# Altium PCB YLCmarlin.PcbDoc (part 1 of 3)
Units mm, origin at the board's own origin, x right, y up, seen from the top; angles counter-clockwise.
Board outline 129.92 x 100.67 mm, 2 copper layers (Top Layer, Bottom Layer); 209 components, 193 nets, 781 pads, 1168 vias.
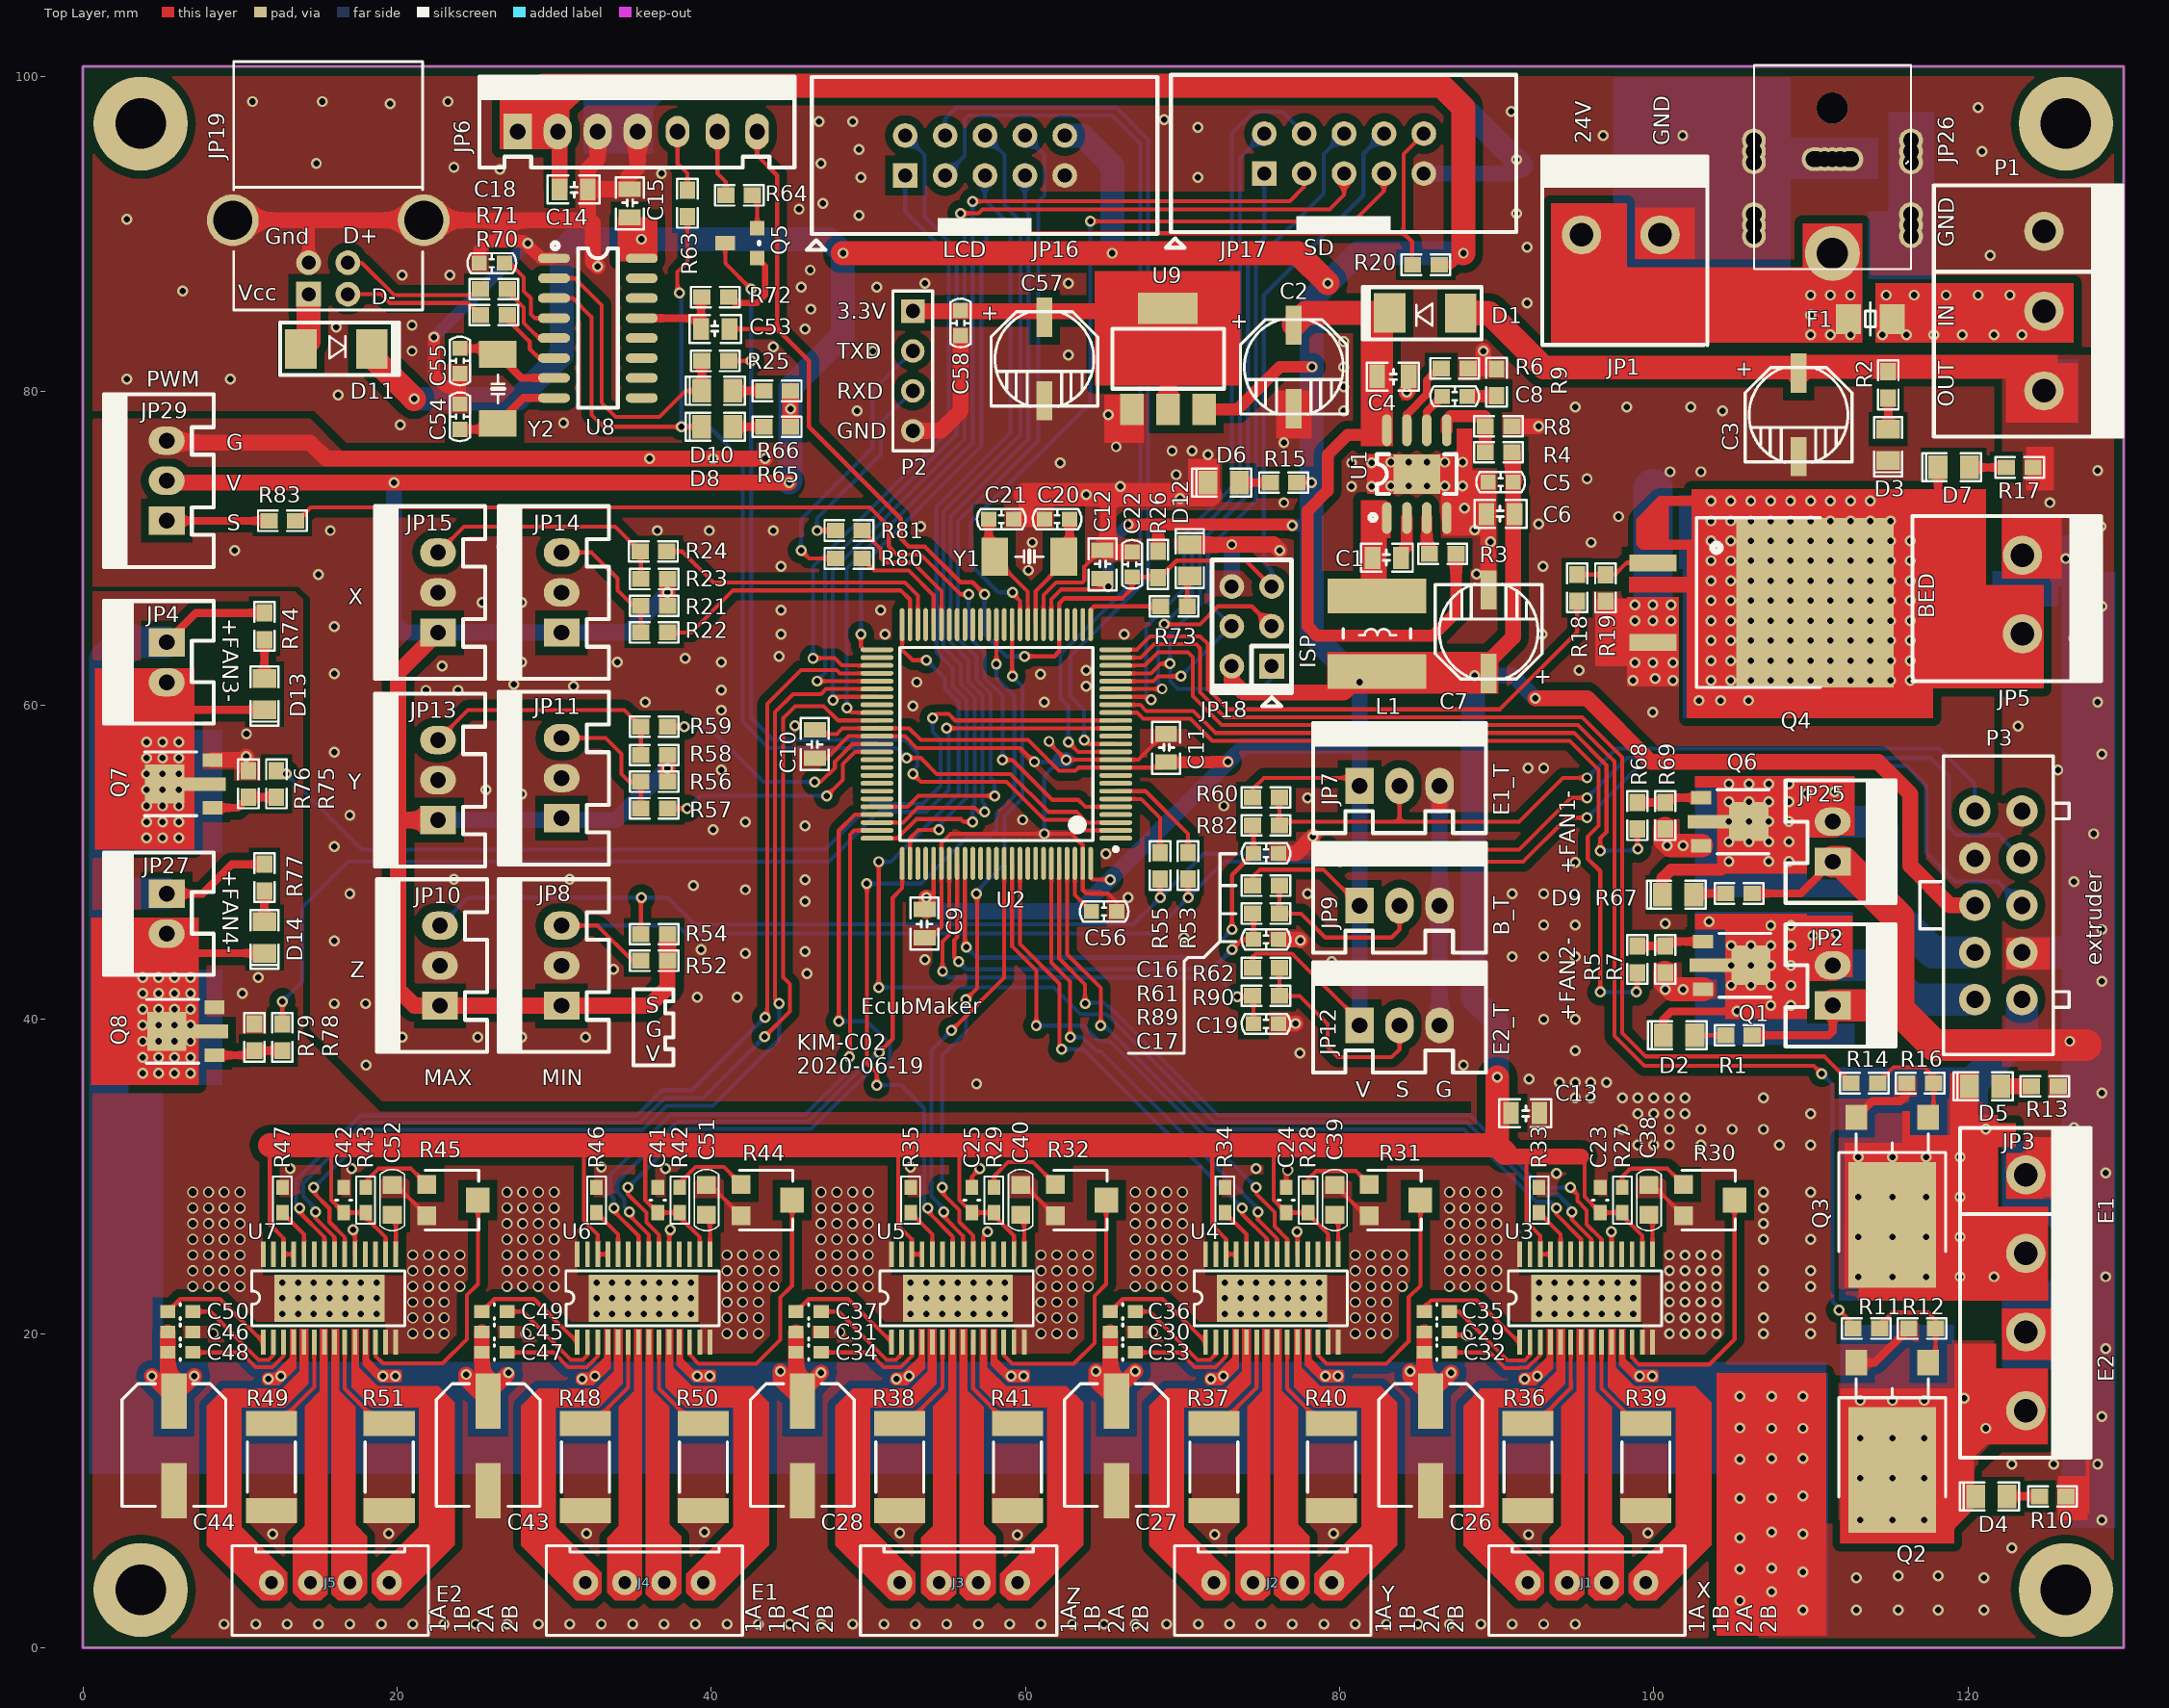
[diagram p0: Top Layer view]
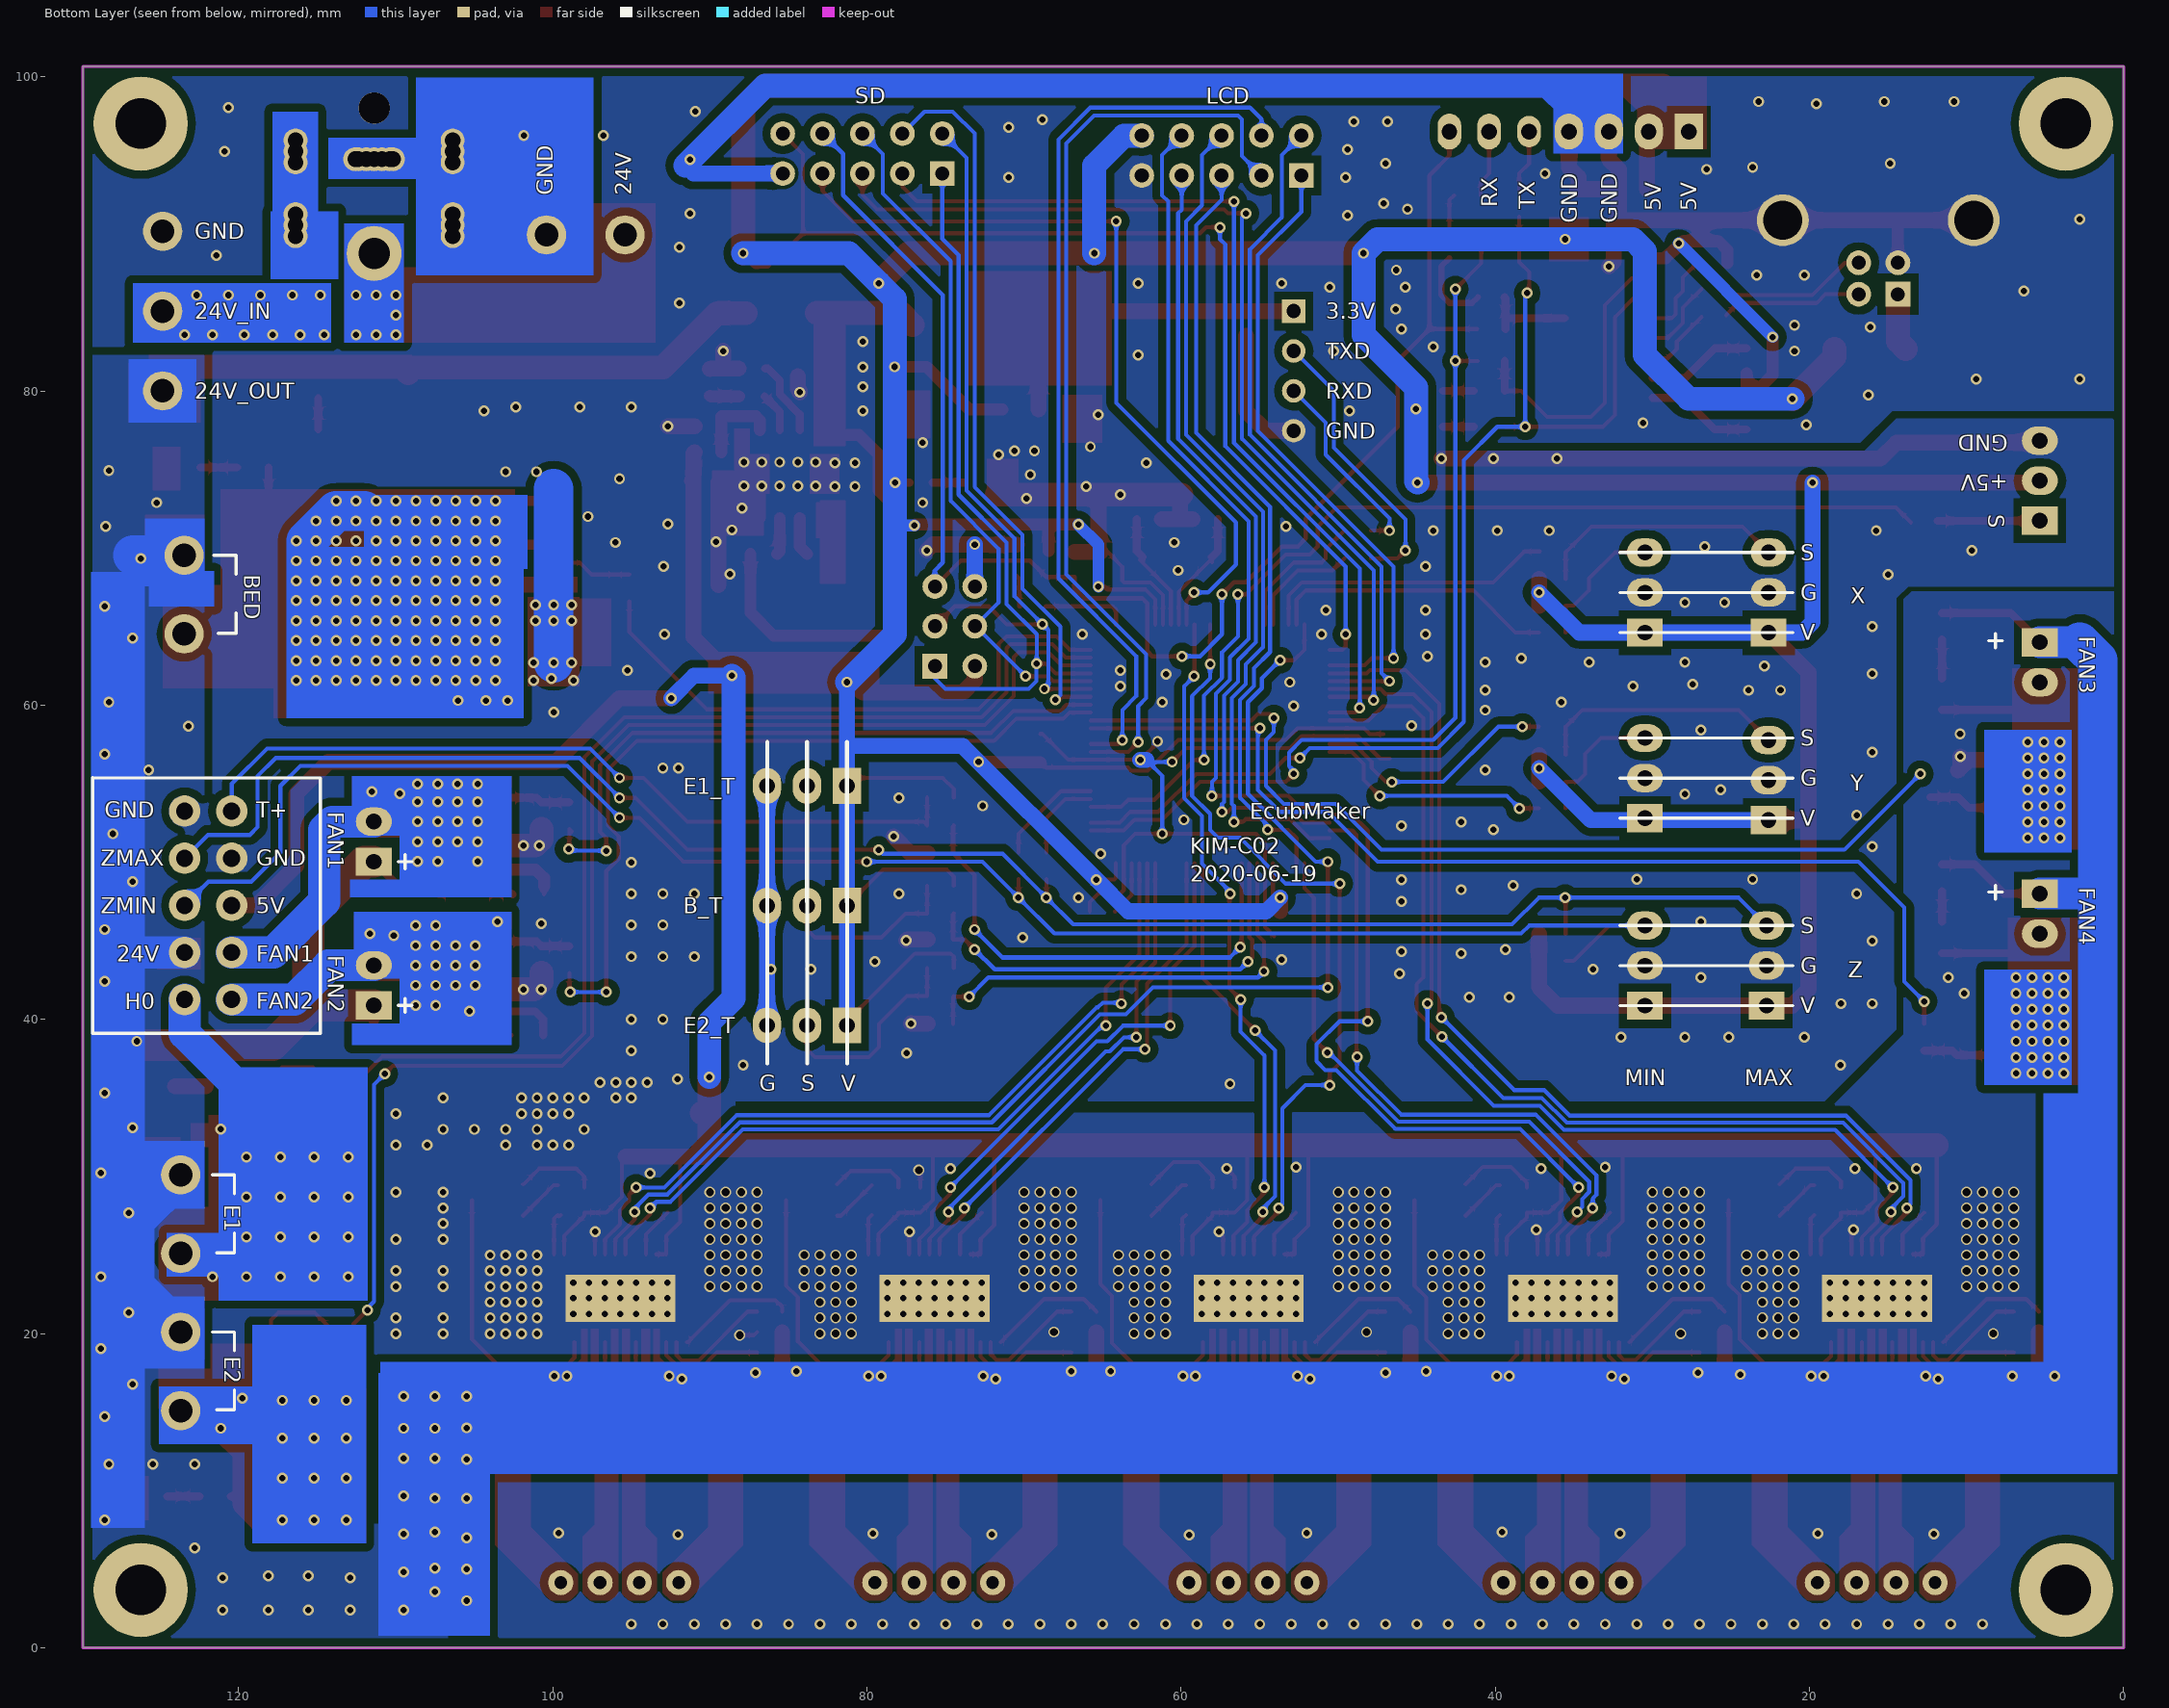
[diagram p1: Bottom Layer view, seen from below]

## Layer stack, top to bottom
Top Solder: solder mask 0.0102, Solder Resist, Dk 3.5
Top Layer: signal copper 0.0356
Dielectric1: core 0.32, FR-4, Dk 4.8
Bottom Layer: signal copper 0.0356
Bottom Solder: solder mask 0.0102, Solder Resist, Dk 3.5

## Board outline
0,0 129.921,0 129.921,100.668 0,100.668

## Design rules (kind name [scope] priority, off if disabled: settings)
Clearance [InPolygon] p1: gap=0.508 ignorepadtopadclearanceinfootprint=FALSE except(0: Arc-Hole Track-Hole SMDPad-Hole THPad-Hole Via-Hole Fill-Hole Poly-Hole Region-Hole Text-Hole)
Clearance Clearance_1 [All] p2: gap=0.2 ignorepadtopadclearanceinfootprint=FALSE except(0: Arc-Hole Track-Hole SMDPad-Hole THPad-Hole Via-Hole Fill-Hole Poly-Hole Region-Hole Text-Hole)
ComponentClearance [All] p1: gap=0.2 collisioncheckmode=3 verticalgap=0.2 showdistances=FALSE
PolygonConnect v12 [InNet('VCC_12V')] p1: connectstyle=Direct reliefconductorwidth=0.254 reliefentries=4 polygonreliefangle="90 Angle" airgapwidth=0.254
PolygonConnect GND [InNet('GND')] p2: connectstyle=Direct reliefconductorwidth=0.254 reliefentries=4 polygonreliefangle="90 Angle" airgapwidth=0.254
PolygonConnect [All] p3: connectstyle=Relief reliefconductorwidth=0.254 reliefentries=4 polygonreliefangle="90 Angle" airgapwidth=0.254
RoutingVias [All] p1: holewidth=0.508 width=0.711 viastyle="Through Hole" minholewidth=0.4 minwidth=0.7 maxholewidth=0.7 maxwidth=1.27
SilkToSolderMaskClearance SilkscreenOverComponentPads [IsPad] p1: minsilkscreentomaskgap=0.254 clearancetoexposedcopper=TRUE
SolderMaskExpansion [All] p1: expansion=0.102
Width 12v [InNet('VCC_12V')] p1: maxlimit=5 minlimit=0.254 preferedwidth=1
Width [All] p2: maxlimit=3.81 minlimit=0.254 preferedwidth=0.254
28 further rules are at their usual default settings.

## Classes and differential pairs
component class Power: C1 C2 C3 C4 C5 C6 C7 C8 C9 C10 C11 C12 C13 C14 C15 C18 C53 C54 C55 C57 C58 D1 D3 D6 D8 D10 D11 F1 JP1 JP6 JP19 JP26 L1 P1 P2 Q5 R2 R3 R4 R6 R8 R9 R15 R25 R63 R64 R65 R66 R70 R71 R72 R80 R81 U1 U8 U9 Y2
component class MCU: C16 C17 C19 C20 C21 C22 C56 D12 JP7 JP8 JP9 JP10 JP11 JP12 JP13 JP14 JP15 JP16 JP17 JP18 JP29 R20 R21 R22 R23 R24 R26 R52 R53 R54 R55 R56 R57 R58 R59 R60 R61 R62 R73 R82 R83 R89 R90 U2 Y1
component class misc: D2 D4 D5 D7 D9 D13 D14 JP2 JP3 JP4 JP5 JP25 JP27 P3 Q1 Q2 Q3 Q4 Q6 Q7 Q8 R1 R5 R7 R10 R11 R12 R13 R14 R16 R17 R18 R19 R67 R68 R69 R74 R75 R76 R77 R78 R79
component class MOTO1: C23 C24 C25 C26 C27 C28 C29 C30 C31 C32 C33 C34 C35 C36 C37 C38 C39 C40 C41 C42 C43 C44 C45 C46 C47 C48 C49 C50 C51 C52 J1 J2 J3 J4 J5 R27 R28 R29 R30 R31 R32 R33 R34 R35 R36 R37 R38 R39 R40 R41 R42 R43 R44 R45 R46 R47 R48 R49 R50 R51 U3 U4 U5 U6 U7

## Components (designator, comment, footprint, x,y, rotation, side; value= is the part's Value field where it differs from the comment)
C1 "104K" 0805(CS) 83.015,69.377 r0 top
C2 "35V100uF" F6#1 77.089,81.534 r180 top (schematic designator C26)
C3 "35V100uF" F6#1 109.22,78.486 r180 top (schematic designator C26)
C4 "104K" 0805(C) 83.396,80.934 r180 top
C5 "106M" 0603(C) 90.254,74.203 r180 top
C6 "104K" 0805(CS) 90.254,72.171 r0 top
C7 "35V47uF" F6#1 89.492,64.678 r0 top
C8 "272K" 0603(C) 87.333,79.664 r0 top
C9 "104K" 0805(CS) 53.594,46.101 r90 top
C10 "104K" 0805(CS) 46.609,57.531 r90 top
C11 "104K" 0805(CS) 68.961,57.277 r270 top
C12 "104K" 0805(CS) 64.897,68.961 r270 top
C13 "104K" 0805(CS) 91.821,34.036 r180 top
C14 "104K" 0805(CS) 31.242,92.837 r180 top
C15 "104" 0805(CS) 34.798,91.948 r270 top
C16 "106M" 0603(C) 75.321,50.57 r0 top
C17 "106M" 0603(C) 75.321,45.085 r0 top
C18 "103" 0603(C) 26.035,88.138 r180 top
C19 "106M" 0603(C) 75.321,39.719 r0 top
C20 "22pF" 0603(C) 62.022,71.844 r0 top
C21 "22pF" 0603(C) 58.466,71.844 r180 top
C22 "102" 0603(C) 66.792,68.961 r270 top
C23 "100n/50V" C0603(1608) 96.6,28.5 r90 top
C24 "100n/50V" C0603(1608) 76.6,28.5 r90 top
C25 "100n/50V" C0603(1608) 56.6,28.5 r90 top
C26 "100UF/35V" C6.3x7.7贴片铝电解电容 82.5,9 r0 top
C27 "100UF/35V" C6.3x7.7贴片铝电解电容 62.5,9 r0 top
C28 "100UF/35V" C6.3x7.7贴片铝电解电容 42.5,9 r0 top
C29 "100n/50V" C0603(1608) 86.2,20.1 r0 top
C30 "100n/50V" C0603(1608) 66.2,20.1 r0 top
C31 "100n/50V" C0603(1608) 46.2,20.1 r0 top
C32 "100n/50V" C0603(1608) 86.2,18.8 r0 top
C33 "100n/50V" C0603(1608) 66.2,18.8 r0 top
C34 "100n/50V" C0603(1608) 46.2,18.8 r0 top
C35 "22n/50V" C0603(1608) 86.2,21.4 r180 top
C36 "22n/50V" C0603(1608) 66.2,21.4 r180 top
C37 "22n/50V" C0603(1608) 46.2,21.4 r180 top
C38 "2.2u/50V" C0805(2012) 99.7,28.5 r90 top
C39 "2.2u/50V" C0805(2012) 79.7,28.5 r90 top
C40 "2.2u/50V" C0805(2012) 59.7,28.5 r90 top
C41 "100n/50V" C0603(1608) 36.6,28.5 r90 top
C42 "100n/50V" C0603(1608) 16.6,28.5 r90 top
C43 "100UF/35V" C6.3x7.7贴片铝电解电容 22.5,9 r0 top
C44 "100UF/35V" C6.3x7.7贴片铝电解电容 2.5,9 r0 top
C45 "100n/50V" C0603(1608) 26.2,20.1 r0 top
C46 "100n/50V" C0603(1608) 6.2,20.1 r0 top
C47 "100n/50V" C0603(1608) 26.2,18.8 r0 top
C48 "100n/50V" C0603(1608) 6.2,18.8 r0 top
C49 "22n/50V" C0603(1608) 26.2,21.4 r180 top
C50 "22n/50V" C0603(1608) 6.2,21.4 r180 top
C51 "2.2u/50V" C0805(2012) 39.7,28.5 r90 top
C52 "2.2u/50V" C0805(2012) 19.7,28.5 r90 top
C53 "104K" 0805(CS) 40.259,83.947 r0 top
C54 "22pF" 0603(C) 24.003,78.359 r270 top
C55 "22pF" 0603(C) 24.003,81.915 r90 top
C56 "105M" 0603(C) 65.014,46.863 r180 top
C57 "16V220uF" F6#2 61.214,84.709 r0 top
C58 "104M" 0603(C) 55.88,84.328 r270 top
D1 "SS24" SMA 85.471,84.963 r180 top
D2 "LED" LED-SMD-0805 101.621,38.99 r180 top
D3 "LED" LED-SMD-0805 114.935,76.581 r270 top
D4 "LED" LED-SMD-0805 121.5,9.64 r180 top
D5 "LED" LED-SMD-0805 121.1,35.74 r180 top
D6 "LED" LED-SMD-0805 72.628,74.168 r180 top
D7 "LED" LED-SMD-0805 119.1,75.14 r180 top
D8 "LED" LED-SMD-0805 40.386,77.724 r180 top
D9 "LED" LED-SMD-0805 101.562,47.95 r180 top
D10 "LED" LED-SMD-0805 40.386,80.01 r180 top
D11 "SS24" SMA 16.129,82.677 r0 top
D12 "LED" LED-SMD-0805 70.475,69.215 r90 top
D13 "LED" LED-SMD-0805 11.557,60.706 r270 top
D14 "LED" LED-SMD-0805 11.557,45.212 r270 top
F1 "10A" 1206(F) 113.792,84.582 r180 top
J1 "H4P" XH2.54(2.5mm)x4P 102,6.5 r180 top
J2 "H4P" XH2.54(2.5mm)x4P 82,6.5 r180 top
J3 "H4P" XH2.54(2.5mm)x4P 62,6.5 r180 top
J4 "H4P" XH2.54(2.5mm)x4P 42,6.5 r180 top
J5 "H4P" XH2.54(2.5mm)x4P 22,6.5 r180 top
JP1 "HEADER 2" "POWER JACK-2*5.0" 98.044,89.916 r0 top
JP2 "FAN1" XH2.54-2P 111.4,42.165 r90 top
JP3 "L&E" KF127-4*5.0 123.698,30.099 r270 top
JP4 "FAN2" XH2.54-2P 5.334,62.733 r270 top
JP5 "BED" "POWER JACK-2*5.0" 123.45,66.907 r270 top
JP6 "Header 7H" XH2.54-7P 35.306,96.52 r0 top
JP7 "ADC13" XH2.54-3P 83.82,54.864 r0 top
JP8 "XMIN" XH2.54-3P 30.48,43.424 r90 top
JP9 "ADC14" XH2.54-3P 83.82,47.244 r0 top
JP10 "XMAX" XH2.54-3P 22.733,43.424 r90 top
JP11 "YMIN" XH2.54-3P 30.48,55.362 r90 top
JP12 "ADC15" XH2.54-3P 83.82,39.624 r0 top
JP13 "YMAX" XH2.54-3P 22.606,55.235 r90 top
JP14 "ZMIN" XH2.54-3P 30.48,67.173 r90 top
JP15 "ZMAX" XH2.54-3P 22.606,67.173 r90 top
JP16 "LCD" IDC10-BASE 57.404,94.996 r0 top
JP17 "SD CARD" IDC10-BASE 80.264,95.123 r0 top
JP18 "ICSP" IDC6X2.54 74.412,65.024 r90 top
JP19 "USB-B" USBBW 15.621,88.519 r270 top locked
JP25 "FAN0" XH2.54-2P 111.4,51.315 r90 top
JP26 "DC5.5-2.5Z" DC-528 111.379,87.757 r0 top locked
JP27 "FAN3" XH2.54-2P 5.334,46.731 r270 top
JP29 "SERVO" XH2.54-3P 5.334,74.295 r90 top
L1 "NR6045T6R8M" COKE_6X6 82.38,64.551 r270 top
P1 "Header 3" "POWER JACK-3*5.0" 124.841,85.09 r270 top
P2 "Header 4" HDR1X4 52.832,85.09 r270 top
P3 "Header 5X2" HX30002-10A 123.444,53.261 r270 top
Q1 "2SD965A" SOT89-3357 104.669,43.435 r270 top
Q2 "NCE3050K" TO252 115.189,14.732 r180 top
Q3 "NCE3050K" TO252 115.189,30.353 r180 top
Q4 "NCE40H20AD" TO263-S 106.813,66.526 r270 top
Q5 "8050" SOT23 41.91,89.408 r90 top
Q6 "2SD965A" SOT89-3357 104.542,52.585 r270 top
Q7 "2SD965A" SOT89-3357 6.731,54.991 r90 top
Q8 "2SD965A" SOT89-3357 6.858,39.243 r90 top
R1 "10K" 0603(R) 105.431,38.99 r180 top
R2 "10K" 0603(R) 114.935,80.391 r270 top
R3 "100K" 0603(R) 86.571,69.631 r180 top
R4 "62K 1%" 0603(R) 90.127,76.108 r180 top
R5 "2K" 0603(R) 98.954,43.816 r90 top
R6 "100K" 0603(R) 87.333,81.442 r0 top
R7 "100K" 0603(R) 100.732,43.816 r90 top
R8 "11K8 1%" 0603(R) 90.127,77.759 r0 top
R9 "24K" 0603(R) 90,80.553 r90 top
R10 "10K" 0603(R) 125.4,9.64 r180 top
R11 "2K" 0603(R) 113.538,20.32 r0 top
R12 "100K" 0603(R) 117.094,20.32 r0 top
R13 "10K" 0603(R) 124.9,35.74 r180 top
R14 "2K" 0603(R) 113.411,35.941 r0 top
R15 "2K" 0603(R) 76.438,74.168 r180 top
R16 "100K" 0603(R) 116.967,35.941 r0 top
R17 "10K" 0603(R) 123.3,75.14 r180 top
R18 "2K" 0603(R) 95.129,67.467 r90 top
R19 "100K" 0603(R) 96.93,67.461 r90 top
R20 "10K" 0603(R) 85.5,88.04 r0 top
R21 "4.7K" 0603(R) 36.373,66.333 r180 top
R22 "1K" 0603(R) 36.373,64.633 r0 top
R23 "4.7K" 0603(R) 36.373,68.033 r180 top
R24 "1K" 0603(R) 36.322,69.786 r0 top
R25 "1K" 0603(R) 40.259,81.915 r180 top
R26 "10K" 0603(R) 68.443,68.961 r90 top
R27 "10k" R0603(1608) 98,28.5 r270 top
R28 "10k" R0603(1608) 78,28.5 r270 top
R29 "10k" R0603(1608) 58,28.5 r270 top
R30 "10k" R3x3-贴片电位器 103.5,28.5 r270 top
R31 "10k" R3x3-贴片电位器 83.5,28.5 r270 top
R32 "10k" R3x3-贴片电位器 63.5,28.5 r270 top
R33 "10k" R0603(1608) 92.7,28.5 r90 top
R34 "10k" R0603(1608) 72.7,28.5 r90 top
R35 "10k" R0603(1608) 52.7,28.5 r90 top
R36 "0.15/2w" R2512 92,11.5 r90 top
R37 "0.15/2w" R2512 72,11.5 r90 top
R38 "0.15/2w" R2512 52,11.5 r90 top
R39 "0.15/2w" R2512 99.5,11.5 r90 top
R40 "0.15/2w" R2512 79.5,11.5 r90 top
R41 "0.15/2w" R2512 59.5,11.5 r90 top
R42 "10k" R0603(1608) 38,28.5 r270 top
R43 "10k" R0603(1608) 18,28.5 r270 top
R44 "10k" R3x3-贴片电位器 43.5,28.5 r270 top
R45 "10k" R3x3-贴片电位器 23.5,28.5 r270 top
R46 "10k" R0603(1608) 32.7,28.5 r90 top
R47 "10k" R0603(1608) 12.7,28.5 r90 top
R48 "0.15/2w" R2512 32,11.5 r90 top
R49 "0.15/2w" R2512 12,11.5 r90 top
R50 "0.15/2w" R2512 39.5,11.5 r90 top
R51 "0.15/2w" R2512 19.5,11.5 r90 top
R52 "4.7K" 0603(R) 36.373,43.733 r180 top
R53 "1K" 0603(R) 70.358,49.784 r90 top
R54 "4.7K" 0603(R) 36.373,45.433 r180 top
R55 "1K" 0603(R) 68.58,49.784 r90 top
R56 "4.7K" 0603(R) 36.373,55.133 r180 top
R57 "1K" 0603(R) 36.373,53.433 r0 top
R58 "4.7K" 0603(R) 36.373,56.833 r180 top
R59 "1K" 0603(R) 36.373,58.633 r0 top
R60 "4.7K" 0603(R) 75.321,54.126 r0 top
R61 "4.7K" 0603(R) 75.321,48.514 r0 top
R62 "4.7K" 0603(R) 75.321,43.275 r0 top
R63 "51R" 0603(R) 38.481,91.948 r270 top
R64 "51R" 0603(R) 41.783,92.456 r0 top
R65 "202" 0603(R) 44.196,77.724 r0 top
R66 "202" 0603(R) 44.196,80.01 r0 top
R67 "10K" 0603(R) 105.431,48.018 r180 top
R68 "2K" 0603(R) 98.954,52.966 r90 top
R69 "100K" 0603(R) 100.732,52.966 r90 top
R70 "22R" 0603(R) 26.162,84.836 r0 top
R71 "22R" 0603(R) 26.162,86.487 r0 top
R72 "1k" 0603(R) 40.259,85.979 r0 top
R73 "2K" 0603(R) 69.459,66.294 r0 top
R74 "10K" 0603(R) 11.557,65.024 r270 top
R75 "2K" 0603(R) 12.319,54.991 r270 top
R76 "100K" 0603(R) 10.541,54.991 r270 top
R77 "10K" 0603(R) 11.557,49.022 r270 top
R78 "2K" 0603(R) 12.7,38.862 r270 top
R79 "100K" 0603(R) 10.922,38.862 r270 top
R80 "101" 0603(R) 48.768,69.342 r180 top
R81 "101" 0603(R) 48.768,71.12 r180 top
R82 "4.7K" 0603(R) 75.321,52.348 r0 top
R83 "1K" 0603(R) 12.7,71.74 r0 top
R89 "4.7K" 0603(R) 75.321,46.736 r0 top
R90 "4.7K" 0603(R) 75.321,41.497 r0 top
U1 "RT7272" SO8-EP 84.92,74.711 r0 top
U2 "ATmega2560-16AU" LQFP100 58.156,57.531 r180 top
U3 "TMC2225" HTSSOP28 100.5,20 r90 top
U4 "TMC2225" HTSSOP28 80.5,20 r90 top
U5 "TMC2225" HTSSOP28 60.5,20 r90 top
U6 "TMC2225" HTSSOP28 40.5,20 r90 top
U7 "TMC2225" HTSSOP28 20.5,20 r90 top
U8 "CH340G" SO-16 32.766,83.947 r270 top
U9 "1117-3.3" SOT223-1117 69.088,82.042 r0 top
Y1 "16M" CRYS-SMD-5032-2P 60.254,69.45 r0 top
Y2 "12M" CRYS-SMD-5032-2P 26.416,80.137 r270 top

## Footprints (in the part's own frame and the unit in brackets; to place one, negate y for a bottom-side part, rotate by r counter-clockwise, add the part's x,y. Pads: shape width x height; smd on the part's side, far side on the other; paste and mask are expansions set on the pad)
0603(C) [mm]
  rect 0.965x0.965 smd: 1(0.8,0) 2(-0.8,0)
  silkscreen extent -1.55,-0.64 1.55,0.64
0603(R) [mm]
  rect 1.1x1 smd: 1(-0.85,0) 2(0.85,0)
  silkscreen extent -1.55,-0.65 1.55,0.65
0805(C) [mm]
  rect 1x1.5 smd: 1(-1,0) 2(1,0)
  silkscreen extent -1.65,-0.88 1.65,0.9
0805(CS) [mm] "兼?"
  rect 1x1.4 smd: 1(-0.9,0) 2(0.9,0)
  silkscreen extent -1.65,-0.88 1.65,0.9
1206(F) [mm]
  rect 1.6x1.9 smd: 1(-1.4,0) 2(1.4,0)
  silkscreen extent -0.33,-1.02 0.33,1.02
C6.3x7.7贴片铝电解电容 [mm]
  rect 1.6x3.5 smd: 1(3.3,6.7) 2(3.3,1)
  silkscreen extent 0,0 6.6,7.8, body extent 0,0 6.6,7.8, height 7.7
C0603(1608) [mm]
  rect 0.965x0.8 smd: 1(-0.8,0) 2(0.8,0)
  silkscreen extent 0,-0.51 0,0.51, body extent -0.8,-0.4 0.8,0.4, height 0.5
C0805(2012) [mm]
  rect 1.14x1.2 smd: 1(-0.95,0) 2(0.95,0)
  silkscreen extent -1.95,-0.78 1.95,0.78, body extent -1,-0.6 1,0.6, height 0.5
COKE_6X6 [mm]
  rect 2.2x6.3 smd: 1(-2.4,0) 2(2.4,0)
  silkscreen extent -0.3,-2.15 0.3,2.15
CRYS-SMD-5032-2P [mm]
  rect 1.7x2.4 smd: 1(-2.2,0) 2(2.2,0)
  silkscreen extent -0.9,-0.37 0.9,0.4
DC-528 [mm]
  round 1.524 hole 1: 0(-5,2.1) 0(-5,2.8) 0(-5,3.5) 0(-5,6.8) 0(-5,7.5) 0(-5,8.2) 0(5,2.1) 0(5,2.8) 0(5,3.5) 0(5,6.8) 0(5,7.5) 0(5,8.2) 2(-1.2,7) 2(-1,7) 2(-0.5,7) 2(0,7) 2(0.5,7) 2(1,7) 2(1.2,7)
  round 2 hole 2: 0(0,10.25)
  round 3.5 hole 2: 1(0,1)
  silkscreen extent -5,0 5,13
F6#1 [mm]
  rect 1x2.5 smd: 1(0,-2.663) 2(0,2.663)
  silkscreen extent -3.4,-3.02 3.4,3.04
F6#2 [mm]
  rect 1x2.5 smd: 1(0,-0.004) 2(0,-5.33)
  silkscreen extent -3.4,-5.71 3.4,0.35
HDR1X4 [mm] "Connector; Header; 4 Position"
  rect 1.5x1.5 hole 0.9: 1(0,0)
  round 1.5 hole 0.9: 2(2.54,0) 3(5.08,0) 4(7.62,0)
  silkscreen extent -1.27,-1.27 8.89,1.27
HTSSOP28 [mm]
  rect 1.6x0.3 smd: 1(-0.55,9.025) 2(-0.55,8.375) 3(-0.55,7.725) 4(-0.55,7.075) 5(-0.55,6.425) 6(-0.55,5.775) 7(-0.55,5.125) 8(-0.55,4.475) 9(-0.55,3.825) 10(-0.55,3.175) 11(-0.55,2.525) 12(-0.55,1.875) 13(-0.55,1.225) 14(-0.55,0.575) 15(5.05,0.575) 16(5.05,1.225) 17(5.05,1.875) 18(5.05,2.525) 19(5.05,3.175) 20(5.05,3.825) 21(5.05,4.475) 22(5.05,5.125) 23(5.05,5.775) 24(5.05,6.425) 25(5.05,7.075) 26(5.05,7.725) 27(5.05,8.375) 28(5.05,9.025)
  rect 3x7 smd: 29(2.25,4.8)
  rect 3x7 smd far side: 29(2.25,4.8)
  silkscreen extent 0.5,0 4,9.75
HX30002-10A [mm]
  round 2 hole 1.1: 1(0,0) 2(0,-3) 3(3,0) 4(3,-3) 5(6,0) 6(6,-3) 7(9,0) 8(9,-3) 9(12,0) 10(12,-3)
  silkscreen extent -3.5,-6.5 15.5,3
IDC6X2.54 [mil]
  rect 62x62 hole 35: 1(-100,-50)
  round 62 hole 35: 2(-100,50) 3(0,-50) 4(0,50) 5(100,-50) 6(100,50)
  silkscreen extent -201,-100 166,100
IDC10-BASE [mil]
  rect 62x62 hole 35: 1(-199.02,-50.2)
  round 62 hole 35: 2(-199.02,49.8) 3(-99.02,-50.2) 4(-99.02,49.8) 5(0.98,-50.2) 6(0.98,49.8) 7(100.98,-50.2) 8(100.98,49.8) 9(200.98,-50.2) 10(200.98,49.8)
  silkscreen extent -446,-236 433,197
KF127-4*5.0 [mm]
  round 2.5 hole 1.5: 1(0,0) 2(5,0) 3(10,0) 4(15,0)
  silkscreen extent -3,-4.2 18,4.1
LED-SMD-0805 [mm]
  rect 1.2x1.5 smd: 1(-1,0) 2(1,0)
  silkscreen extent -1.75,-0.89 2,0.89
LQFP100 [mm]
  oval 2.1x0.3 smd: 1(-7.6,6) 2(-7.6,5.5) 3(-7.6,5) 4(-7.6,4.5) 5(-7.6,4) 6(-7.6,3.5) 7(-7.6,3) 8(-7.6,2.5) 9(-7.6,2) 10(-7.6,1.5) 11(-7.6,1) 12(-7.6,0.5) 13(-7.6,0) 14(-7.6,-0.5) 15(-7.6,-1) 16(-7.6,-1.5) 17(-7.6,-2) 18(-7.6,-2.5) 19(-7.6,-3) 20(-7.6,-3.5) 21(-7.6,-4) 22(-7.6,-4.5) 23(-7.6,-5) 24(-7.6,-5.5) 25(-7.6,-6) 51(7.6,-6) 52(7.6,-5.5) 53(7.6,-5) 54(7.6,-4.5) 55(7.6,-4) 56(7.6,-3.5) 57(7.6,-3) 58(7.6,-2.5) 59(7.6,-2) 60(7.6,-1.5) 61(7.6,-1) 62(7.6,-0.5) 63(7.6,0) 64(7.6,0.5) 65(7.6,1) 66(7.6,1.5) 67(7.6,2) 68(7.6,2.5) 69(7.6,3) 70(7.6,3.5) 71(7.6,4) 72(7.6,4.5) 73(7.6,5) 74(7.6,5.5) 75(7.6,6)
  oval 0.3x2.1 smd: 26(-6,-7.6) 27(-5.5,-7.6) 28(-5,-7.6) 29(-4.5,-7.6) 30(-4,-7.6) 31(-3.5,-7.6) 32(-3,-7.6) 33(-2.5,-7.6) 34(-2,-7.6) 35(-1.5,-7.6) 36(-1,-7.6) 37(-0.5,-7.6) 38(0,-7.6) 39(0.5,-7.6) 40(1,-7.6) 41(1.5,-7.6) 42(2,-7.6) 43(2.5,-7.6) 44(3,-7.6) 45(3.5,-7.6) 46(4,-7.6) 47(4.5,-7.6) 48(5,-7.6) 49(5.5,-7.6) 50(6,-7.6) 76(6,7.6) 77(5.5,7.6) 78(5,7.6) 79(4.5,7.6) 80(4,7.6) 81(3.5,7.6) 82(3,7.6) 83(2.5,7.6) 84(2,7.6) 85(1.5,7.6) 86(1,7.6) 87(0.5,7.6) 88(0,7.6) 89(-0.5,7.6) 90(-1,7.6) 91(-1.5,7.6) 92(-2,7.6) 93(-2.5,7.6) 94(-3,7.6) 95(-3.5,7.6) 96(-4,7.6) 97(-4.5,7.6) 98(-5,7.6) 99(-5.5,7.6) 100(-6,7.6)
  silkscreen extent -7.72,-6.15 6.15,6.82
"POWER JACK-2*5.0" [mm]
  round 2.5 hole 1.5: 1(-2.633,0.023) 2(2.367,0.023)
  silkscreen extent -5.13,-6.98 5.37,5.02
"POWER JACK-3*5.0" [mm]
  round 2.5 hole 1.5: 1(-5.08,0) 2(0,0) 3(5.08,0)
  silkscreen extent -8,-7 8,5
R3x3-贴片电位器 [mm]
  rect 1.2x1.2 smd: 1(-1,-1.6) 3(1,-1.6)
  rect 1.6x1.5 smd: 2(0,1.65)
  silkscreen extent -1.9,-1.7 1.9,1.7, body extent -1.55,-1.8 1.55,1.95, height 1.55
R0603(1608) [mm]
  rect 0.965x0.8 smd: 1(-0.8,0) 2(0.8,0)
  silkscreen extent -1.5,-0.6 1.5,0.6, body extent -0.8,-0.4 0.8,0.4, height 0.5
R2512 [mm]
  rect 1.6x3.25 smd: 1(-2.775,0) 2(2.775,0)
  silkscreen extent -1.6,-1.52 1.6,1.53, body extent -3.17,-1.6 3.17,1.6, height 0.6
SMA [mm]
  rect 2x2.5 smd: 1(-2.25,0.003) 2(2.275,-0.003)
  silkscreen extent -3.58,-1.65 4,1.68
SO8-EP [mil]
  oval 24x80 smd: 1(-75,-110) 2(-25,-110) 3(25,-110) 4(75,-110) 5(75,110) 6(25,110) 7(-25,110) 8(-75,110)
  rect 117.72x98.03 smd: 9(0,0)
  silkscreen extent -118,-116 100,50
SO-16 [mil]
  oval 24x80 smd: 1(-177.31,-109.18) 2(-127.31,-109.18) 3(-77.31,-109.18) 4(-27.31,-109.18) 5(22.69,-109.18) 6(72.69,-109.18) 7(122.69,-109.18) 8(172.69,-109.18) 9(172.69,110.82) 10(122.69,110.82) 11(72.69,110.82) 12(22.69,110.82) 13(-27.31,110.82) 14(-77.31,110.82) 15(-127.31,110.82) 16(-177.31,110.82)
  silkscreen extent -217,-114 198,51
SOT23 [mil]
  rect 36x36 smd: 1(-37.5,-40) 2(37.5,-40)
  rect 36x50 smd: 3(0.5,40)
  silkscreen extent -2,-45 3,-45
SOT89-3357 [mm]
  rect 0.864x1.27 smd: 1(-1.524,-1.52) 2(1.524,-1.52)
  rect 2.5x2.5 smd: 3(-0.009,1.52)
  rect 0.864x3 smd: 3(-0.009,-0.88)
  silkscreen extent -2.03,-0.5 2.03,2.8
SOT223-1117 [mil]
  rect 59x79 smd: 1(-90.55,-126.77) 2(0,-126.77) 3(90.55,-126.77)
  rect 150x79 smd: 2(-0.67,126.77)
  silkscreen extent -140,-75 140,75
TO252 [mm]
  rect 1.4x1.6 smd: 1(-2.285,-3.423) 3(2.285,-3.423)
  rect 5.6x8 smd: 2(0,3.423)
  silkscreen extent -3.4,-2.38 3.4,5.12
TO263-S [mm]
  rect 1.07x3 smd: 1(-2.54,-6.85) 3(2.54,-6.85)
  rect 10.8x10 smd: 2(0,3.45)
  silkscreen extent -5.4,-4.09 5.4,3.79
USBBW [mm]
  rect 1.575x1.575 hole 0.889: 1(2.355,-1.25)
  round 1.575 hole 0.889: 2(2.355,1.25) 3(0.355,1.25) 4(0.355,-1.25)
  round 3.299 hole 2.5: 5(-2.355,-6.08) 6(-2.355,6.08)
  silkscreen extent -12.44,-6.02 3.35,6.02
XH2.54(2.5mm)x4P [mm]
  round 1.6 hole 0.8: 1(2.5,2.35) 2(5,2.35) 3(7.5,2.35) 4(10,2.35)
  silkscreen extent 0,0 12.5,5.7, body extent 0,0 12.5,5.7, height 8
XH2.54-2P [mm]
  rect 1.8x2.286 hole 1: 1(-1.275,0)
  oval 1.8x2.286 hole 1: 2(1.275,0)
  silkscreen extent -3.9,-4 3.9,3
XH2.54-3P [mm]
  rect 1.8x2.286 hole 1: 1(-2.55,0)
  oval 1.8x2.286 hole 1: 2(0,0) 3(2.55,0)
  silkscreen extent -5.5,-3 5.5,4
XH2.54-7P [mm]
  rect 1.8x2.286 hole 1: 1(-7.62,0)
  oval 1.8x2.286 hole 1: 2(-5.07,0) 3(-2.53,0) 4(0.01,0)
  oval 1.5x2 hole 1: 5(2.55,0)
  oval 1.5x2.286 hole 1: 6(5.09,0) 7(7.62,0)
  silkscreen extent -10.07,-2.3 10,3.5

## Part data
C1 C4 C5 C6 C8 C9 C10 C11 C12 C13 C14 C15 C16 C17 C18 C19 C20 C21 C22 C53 C54 C55 C56 C58: library part Cap, "Capacitor"
C2 C3 C7 C57: library part ELECTRO1, "Electrolytic Capacitor"
C23 C24 C25 C29 C30 C31 C32 C33 C34 C35 C36 C37 C38 C39 C40 C41 C42 C45 C46 C47 C48 C49 C50 C51 C52: library part Caps
C26 C27 C28 C43 C44: library part Capsp
D1 D11: library part DIODE, "Diode"
D2 D4 D5 D7 D8 D9 D10 D12 D13 D14: library part LED1, "Typical RED GaAs LED"
F1: library part FUSE1, "Fuse"
JP2 JP4 JP5 JP25 JP27: library part "HEADER 2"
JP3: library part "4 HEADER", "4 Pin Header"
JP6: "Header, 7-Pin, Right Angle"
JP7 JP8 JP9 JP10 JP11 JP12 JP13 JP14 JP15 JP29: library part "HEADER 3"
JP16 JP17: library part "HEADER 5X2"
JP18: library part "HEADER 3X2"
JP19: library part "HEADER 6"
L1: library part INDUCTOR
P1: "Header, 3-Pin"
P2: "Header, 4-Pin"
P3: "Header, 5-Pin, Dual row"
Q1 Q5 Q6 Q7 Q8: library part NPN, "NPN Transistor"
Q2 Q3 Q4: library part NMOS
R1 R2 R3 R4 R6 R8 R9 R10 R13 R15 R17 R63 R64 R65 R66 R67 R70 R71 R72 R73 R74 R77 R80 R81: library part Res2, "Resistor"
R5 R7 R11 R12 R14 R16 R18 R19 R20 R21 R23 R26 R52 R54 R56 R58 R60 R61 R62 R68 R69 R75 R76 R78 R79 R82 R89 R90: library part Res2, "1K"
R22 R24 R53 R55 R57 R59 R83: library part Res2
R25: library part RES2, "Resistor"
R27 R28 R29 R33 R34 R35 R36 R37 R38 R39 R40 R41 R42 R43 R46 R47 R48 R49 R50 R51: library part Ress
R30 R31 R32 R44 R45: library part Resc
U2: library part ATmega2560
U9: library part 1117
Y1 Y2: library part CRYSTAL, "Crystal"

## Free pads (board coordinates)
  round 6 hole 3.2: 0(3.683,3.683) 0(3.683,97.028) 0(126.238,3.683) 0(126.238,97.028)

## Via types
v1: diameter 0.7, hole 0.4, Top Layer to Bottom Layer, tented both sides, 830 vias
v2: diameter 0.7, hole 0.5, Top Layer to Bottom Layer, tented both sides, 230 vias
v3: diameter 0.7, hole 0.4, Top Layer to Bottom Layer, 108 vias

## Nets (pads, with @x,y where several pads share a name; then routed paths per layer and width w, separated by ;. In a path a pad name is that pad's centre, name@x,y a point inside that pad or via, vN(x,y) a via of type N, cw(c..) or ccw(c..) an arc to the next point about the centre after c; other vN are vias at no path point)
3.3V: C57.1 C58.2 P2.1 U9.2 | length 22.7
  Top Layer w1.016: P2.1@52.832,85.09 U9.2@68.899,85.09 ; U9.2@69.071,85.262 U9.2@68.899,85.09 ; U9.2@69.088,78.822 69.088,84.901 U9.2@68.899,85.09
/EN_E0: U2.76 U6.21 | length 38.2
  Top Layer w0.254: v1(34.8,27.75) 34.8,27.513 36.025,26.288 U6.21@36.025,25.05 ; v1(50.7,37.9) 51.552,38.752 51.552,47.742 52.156,48.346 U2.76@52.156,49.931
  Bottom Layer w0.254: v1(34.8,27.75) 34.477,28.073 34.477,28.566 34.023,29.02 34.023,29.657 37.85,33.484 46.184,33.484 50.6,37.9 v1(50.7,37.9)
/EN_E1: U2.60 U7.21 | length 66.4
  Top Layer w0.254: v1(14.8,27.75) 14.8,27.358 16.025,26.133 U7.21@16.025,25.05 ; v1(43.4,38.9) 45.006,40.506 45.006,42.243 44.577,42.672 44.577,59.182 45.339,59.944 47.158,59.944 48.071,59.031 U2.60@50.556,59.031
  Bottom Layer w0.254: v1(14.8,27.75) 14.8,27.957 14.023,28.734 14.023,29.58 17.864,33.421 35.454,33.421 37.033,35 39.5,35 v1(43.4,38.9)
/EN_X: U2.50 U3.21 | length 81
  Top Layer w0.254: v1(50.663,50.038) 50.663,42.047 v1(50.673,42.037) ; U2.50@52.156,65.131 52.156,63.531 52.822,62.865 v1(53.711,62.865) ; v1(94.8,27.75) 94.8,27.242 96.025,26.017 U3.21@96.025,25.05
  Bottom Layer w0.254: v1(50.663,50.038) 51.435,50.038 55.753,54.356 55.753,60.198 54.864,61.087 54.864,61.712 v1(53.711,62.865) ; v1(50.673,42.037) 61.798,42.037 63.517,40.317 65.183,40.317 72.054,33.446 88.096,33.446 88.7,32.842 88.716,32.842 92.712,28.846 93.911,28.846 94.8,27.957 v1(94.8,27.75)
/EN_Y: U2.95 U4.21 | length 31.4
  Top Layer w0.254: U2.95@61.656,49.931 61.656,43.617 62.855,42.418 v1(62.855,38.862) ; v1(74.8,27.75) 74.8,27.258 76.025,26.033 U4.21@76.025,25.05
  Bottom Layer w0.254: v1(62.855,38.862) 63.638,38.862 64.546,37.954 64.803,37.954 74.8,27.957 v1(74.8,27.75)
/EN_Z: U2.89 U5.21 | length 27.6
  Top Layer w0.254: v1(54.8,27.75) 54.8,27.458 56.025,26.233 U5.21@56.025,25.05 ; v1(55.3,39.3) 58.656,42.656 U2.89@58.656,49.931
  Bottom Layer w0.254: v1(54.8,27.75) 54.8,27.957 54.023,28.734 54.023,38.023 v1(55.3,39.3)
ADC11: U2.86
ADC12: U2.85
ADC13: C16.2 R82.1 U2.84 | length 30.5
  Top Layer w0.279: U2.84@56.156,49.931 56.156,44.687 v1(56.238,44.605) ; v1(73.152,45.72) 73.152,49.201 C16.2@74.521,50.57 74.521,52.298 R82.1@74.471,52.348
  Bottom Layer w0.279: v1(56.238,44.605) 56.901,43.942 71.374,43.942 v1(73.152,45.72)
ADC14: C17.2 R89.1 U2.83 | length 28
  Top Layer w0.279: U2.83@55.656,49.931 55.656,45.227 55.489,45.06 55.489,43.942 v1(55.743,43.688) ; v1(73.152,44.45) 73.787,45.085 C17.2@74.521,45.085 74.521,46.686 R89.1@74.471,46.736
  Bottom Layer w0.279: v1@55.616,43.815 v1(55.743,43.688) 56.251,43.18 71.882,43.18 v1(73.152,44.45)
ADC15: C19.2 R90.1 U2.82 | length 29.3
  Top Layer w0.254: v1(54.727,43.053) 54.727,44.958 55.149,45.38 55.149,48.507 55.156,48.514 U2.82@55.156,49.931 ; v1(73.5,41.44) 74.414,41.44 R90.1@74.471,41.497 74.521,41.447 C19.2@74.521,39.719
  Bottom Layer w0.254: v1(54.727,43.053) 55.108,42.672 72.268,42.672 v1(73.5,41.44)
BED: R18.1 U2.25 | length 37.3
  Top Layer w0.254: U2.25@65.756,63.531 67.087,63.531 67.945,64.389 71.12,64.389 71.628,63.881 71.628,61.012 72.9,59.74 90.22,59.74 95.129,64.649 R18.1@95.129,66.618
D+: R71.2 U8.5 | length 5
  Top Layer w0.254: R71.2@26.885,86.487 28.067,85.305 28.067,84.328 29.024,83.371 U8.5@29.993,83.371
D-: R70.2 U8.6 | length 4.5
  Top Layer w0.254: R70.2@26.885,84.709 28.448,83.146 28.448,82.677 29.024,82.101 U8.6@29.993,82.101
DIR_E0: U2.72 U6.20 | length 45
  Top Layer w0.254: v1(34.7,29.3) 34.7,28.873 35.873,27.7 35.873,27.082 36.675,26.28 U6.20@36.675,25.05 ; v1(48.123,39.878) 48.123,52.015 49.139,53.031 U2.72@50.556,53.031
  Bottom Layer w0.254: v1(34.7,29.3) 38.43,33.03 46.372,33.03 50.121,36.779 50.827,36.779 51.383,37.335 51.383,38.417 49.922,39.878 v1(48.123,39.878)
DIR_E1: U2.56 U7.20 | length 66.6
  Top Layer w0.254: v1(14.7,29.3) 14.7,28.958 15.7,27.958 15.7,27.1 16.675,26.125 U7.20@16.675,25.05 ; v1(44.323,41.021) 44.069,41.275 44.069,59.563 45.212,60.706 46.99,60.706 47.315,61.031 U2.56@50.556,61.031
  Bottom Layer w0.254: v1(14.7,29.3) 18.367,32.967 35.642,32.967 37.175,34.5 40.1,34.5 44.323,38.723 v1(44.323,41.021)
DIR_X: U2.96 U3.20 | length 50.5
  Top Layer w0.254: U2.96@62.156,49.931 62.156,43.879 63.8,42.235 v1(63.8,41) ; v1(94.7,29.3) 95.146,28.854 95.146,28.454 95.737,27.862 95.737,26.947 96.675,26.009 U3.20@96.675,25.05
  Bottom Layer w0.254: v1(63.8,41) 63.869,41.069 65,41.069 65.297,40.771 65.371,40.771 72.242,33.9 88.3,33.9 92.9,29.3 v1(94.7,29.3)
DIR_Y: U2.90 U4.20 | length 34.3
  Top Layer w0.254: U2.90@59.156,49.931 59.156,44.644 60.7,43.1 v1(60.7,39.6) ; v1(74.7,29.3) 74.7,28.9 75.873,27.727 75.873,26.827 76.675,26.025 U4.20@76.675,25.05
  Bottom Layer w0.254: v1(60.7,39.6) 63.7,39.6 64.7,38.6 65.4,38.6 v1(74.7,29.3)
DIR_Z: U2.36 U5.20 | length 43.3
  Top Layer w0.254: v1(54.7,29.3) 54.7,28.958 55.8,27.858 55.8,27.1 56.675,26.225 U5.20@56.675,25.05 ; v1(56.217,41.266) 56.934,41.983 56.934,47.958 v1(56.886,48.006) ; U2.36@59.156,65.131 59.156,61.865 v1(59.172,61.849)
  Bottom Layer w0.254: v1(54.7,29.3) 54.7,37.7 56.217,39.217 v1(56.217,41.266) ; v1(56.886,48.006) 56.886,48.133 58.674,49.921 58.674,52.952 59.817,54.095 59.817,61.204 v1(59.172,61.849)
E0: R14.1 U2.24 | length 70.7
  Top Layer w0.254: U2.24@65.756,63.031 67.349,63.031 68.199,63.881 70.866,63.881 71.12,63.627 71.12,60.82 72.7,59.24 95.446,59.24 98,56.686 98,39.14 99.5,37.64 110.862,37.64 R14.1@112.561,35.941
E0_MOS: D5.2 JP3.2 P3.9 Q3.2 | length 12.5
  Bottom Layer w2.032: v1(117.348,31.242) 117.348,33.02 123.444,39.116 P3.9@123.444,41.261
  other v1: 113.03,23.622 115.189,23.622 117.348,23.622 119.507,23.622 121.666,23.622 113.03,26.162 115.189,26.162 117.348,26.162 119.507,26.162 113.03,28.702 115.189,28.702 117.348,28.702 119.507,28.702 113.03,31.242 115.189,31.242 119.507,31.242 121.158,33.02
E0_T: JP7.2 P3.2 R60.2 R82.2 | length 53
  Top Layer w0.254: R60.2@76.171,54.126 R82.2@76.171,52.348 76.401,52.578 82.804,52.578 91.44,52.578 94.234,55.372 v1(95.758,55.372) ; 83.82,52.578 JP7.2@83.82,54.864
  Bottom Layer w0.254: v1(95.758,55.372) 97.626,57.24 118.2,57.24 120.444,54.996 P3.2@120.444,53.261
E1: R11.1 U2.23 | length 85.2
  Top Layer w0.254: U2.23@65.756,62.531 67.611,62.531 68.453,63.373 70.358,63.373 70.66,63.071 70.66,60.58 72.5,58.74 95.184,58.74 97.5,56.424 97.5,38.94 99.4,37.04 110.2,37.04 v1(110.7,36.54) ; v1(111.8,21.5) 112.688,20.612 R11.1@112.688,20.32
  Bottom Layer w0.254: v1(110.7,36.54) 111.379,35.861 111.379,22.046 111.8,21.625 v1(111.8,21.5)
F0_MOS: D9.2 JP25.2 P3.8 Q6.3 | length 27.5
  Top Layer w0.254: D9.2@100.562,47.95 D9.2@100.562,48.492
  Top Layer w0.762: D9.2@100.562,48.492 100.562,49 101.092,49.53 104.281,49.53 v1(104.796,50.045)
  Top Layer w1.524: Q6.3@105.177,51.709 v1(106.062,52.594)
  Top Layer w2.032: v1(106.062,52.594) 106.066,52.59 JP25.2@111.4,52.59
  Bottom Layer w2.032: JP25.2@111.4,52.59 114.034,52.59 114.554,52.07 114.554,47.498 117.791,44.261 P3.8@120.444,44.261
  other v1: 107.336,50.045 108.606,50.045 104.796,51.315 106.066,51.315 107.336,51.315 108.606,51.315 104.796,52.585 107.336,52.585 108.606,52.585 104.796,53.855 106.066,53.855 107.336,53.855 108.606,53.855 109.749,54.363 111.527,54.49 104.796,54.998 106.066,54.998 107.336,54.998 108.606,54.998
F1_MOS: D2.2 JP2.2 P3.10 Q1.3 | length 24.3
  Top Layer w0.508: D2.2@100.621,38.99 100.621,40.022 101.113,40.514 104.542,40.514 105.05,41.022 105.05,42.8 104.406,43.444 Q1.3@103.789,43.444
  Top Layer w2.032: Q1.3@106.189,43.444 v1(106.193,43.44) JP2.2@111.4,43.44
  Bottom Layer w2.032: JP2.2@111.4,43.44 114.294,43.44 116.473,41.261 P3.10@120.444,41.261
  other v1: 105.304,40.514 107.463,40.895 108.733,40.895 104.923,42.165 106.193,42.165 107.463,42.165 108.733,42.165 104.923,43.435 107.463,43.435 108.733,43.435 104.923,44.705 106.193,44.705 107.463,44.705 108.733,44.705 110.13,45.34 111.654,45.467 107.463,45.975 108.733,45.975 103.526,46.229
FAN: R68.1 U2.18 | length 42.2
  Top Layer w0.254: U2.18@65.756,60.031 67.309,60.031 67.7,59.64 70.7,59.64 72.1,58.24 94.922,58.24 97,56.162 97,51.94 96.6,51.54 v1(96.6,50.74) ; R68.1@98.788,51.95 R68.1@98.827,51.989 ; R68.1@98.954,52.116 98.954,50.886 v1(99,50.84)
  Bottom Layer w0.254: v1(96.6,50.74) 98.9,50.74 v1(99,50.84)
FAN1: R5.1 U2.17 | length 50.6
  Top Layer w0.254: U2.17@65.756,59.531 67.109,59.531 67.5,59.14 70.5,59.14 71.9,57.74 94.66,57.74 96.5,55.9 96.5,52.34 95.8,51.64 95.8,50.24 96.6,49.44 v1(96.6,41.74) ; v1(98.9,41.74) 98.954,41.794 R5.1@98.954,42.966
  Bottom Layer w0.254: v1(96.6,41.74) v1(98.9,41.74)
FAN2: R75.1 U2.16 | length 62
  Top Layer w0.254: v1@12.866,55.714 v1(12.954,55.626) ; v1(54.102,59.182) 54.356,59.436 55.118,59.436 55.523,59.031 U2.16@65.756,59.031
  Bottom Layer w0.254: v1(12.954,55.626) 17.78,50.8 47.244,50.8 50.165,53.721 53.467,53.721 54.61,54.864 54.61,57.785 54.102,58.293 54.102,59.055 v1@54.229,59.182
FAN3: R78.1 U2.15 | length 66.8
  Top Layer w0.254: R78.1@12.7,39.712 v1(12.7,41.148) ; v1@55.134,58.531 U2.15@65.756,58.531
  Bottom Layer w0.254: v1(12.7,41.148) 13.97,42.418 13.97,47.117 16.891,50.038 47.498,50.038 50.673,53.213 53.721,53.213 55.118,54.61 55.118,58.547 v1@55.134,58.531
  other v1: 54.991,58.547